# Altium PCB PCB.PcbDoc
Units mil, origin at the board's own origin, x right, y up, seen from the top; angles counter-clockwise.
Board outline 2695 x 1945 mil, 2 copper layers (Top Layer, Bottom Layer); 42 components, 30 nets, 152 pads, 23 vias.
Unrouted connection lines stored in the file: 4.
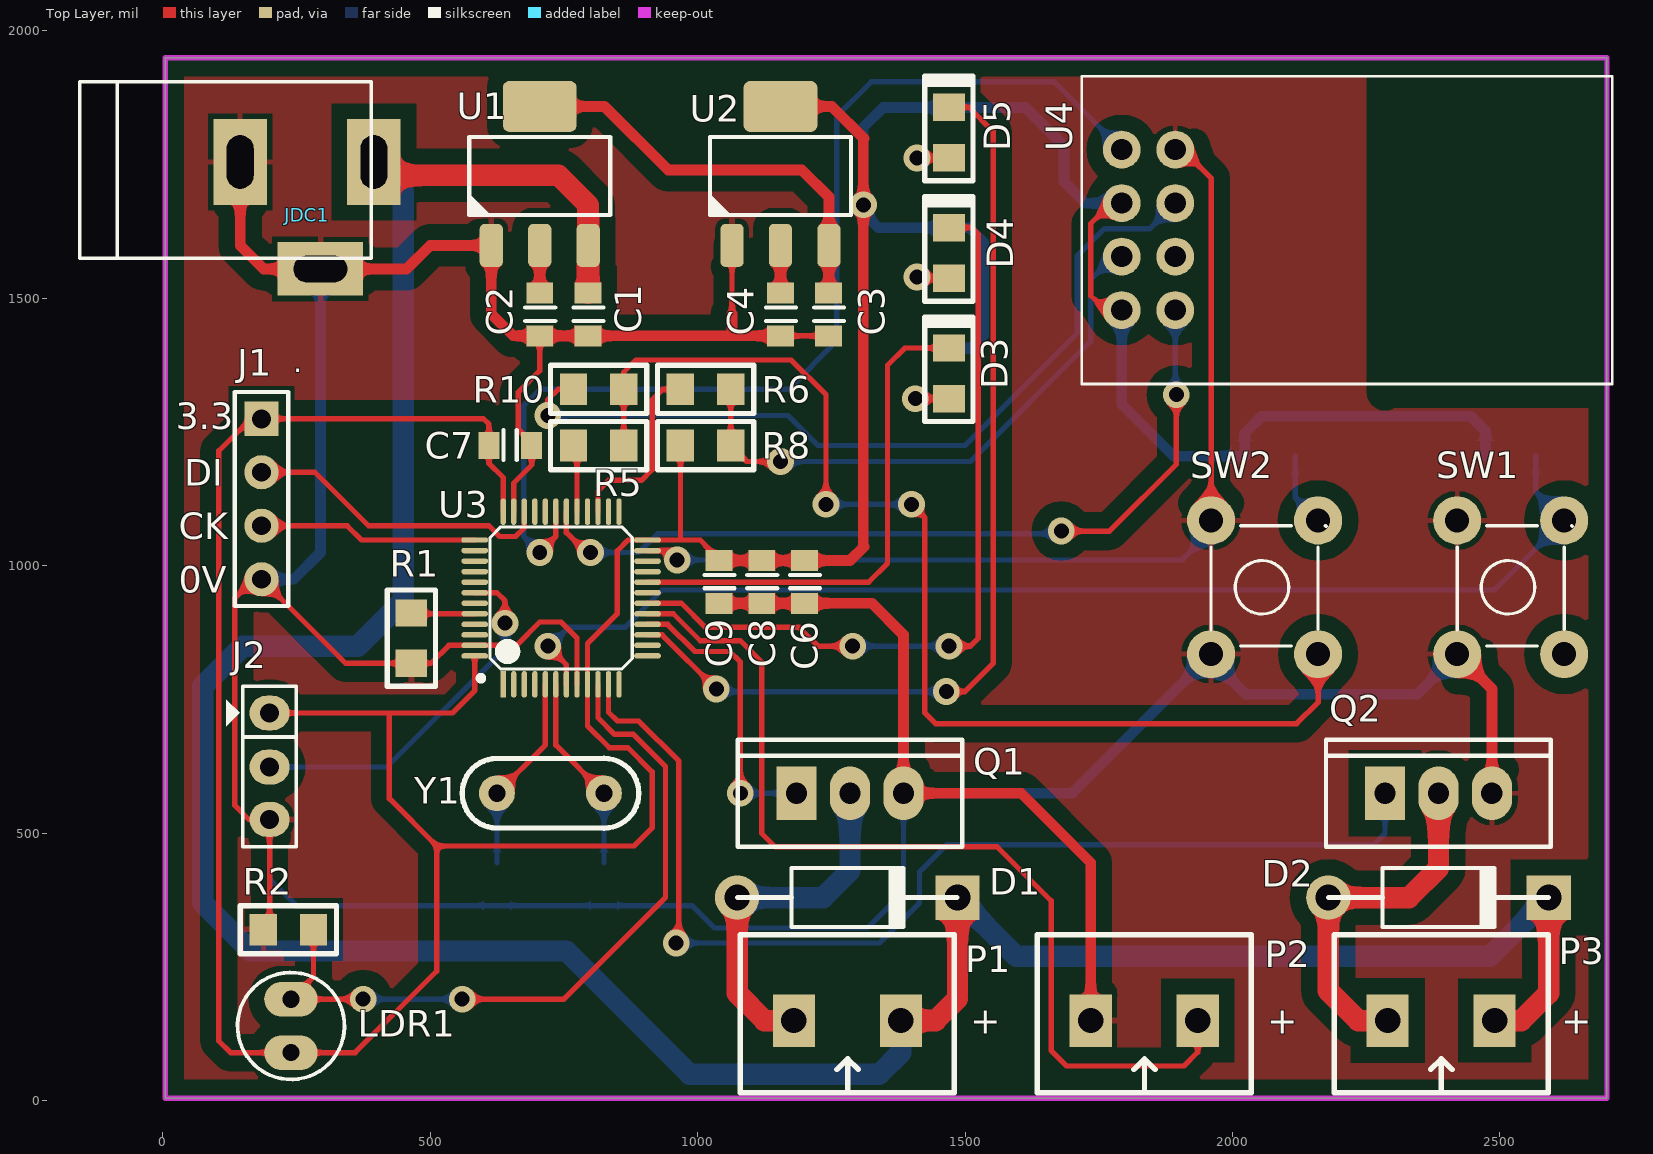
[diagram p0: Top Layer view]
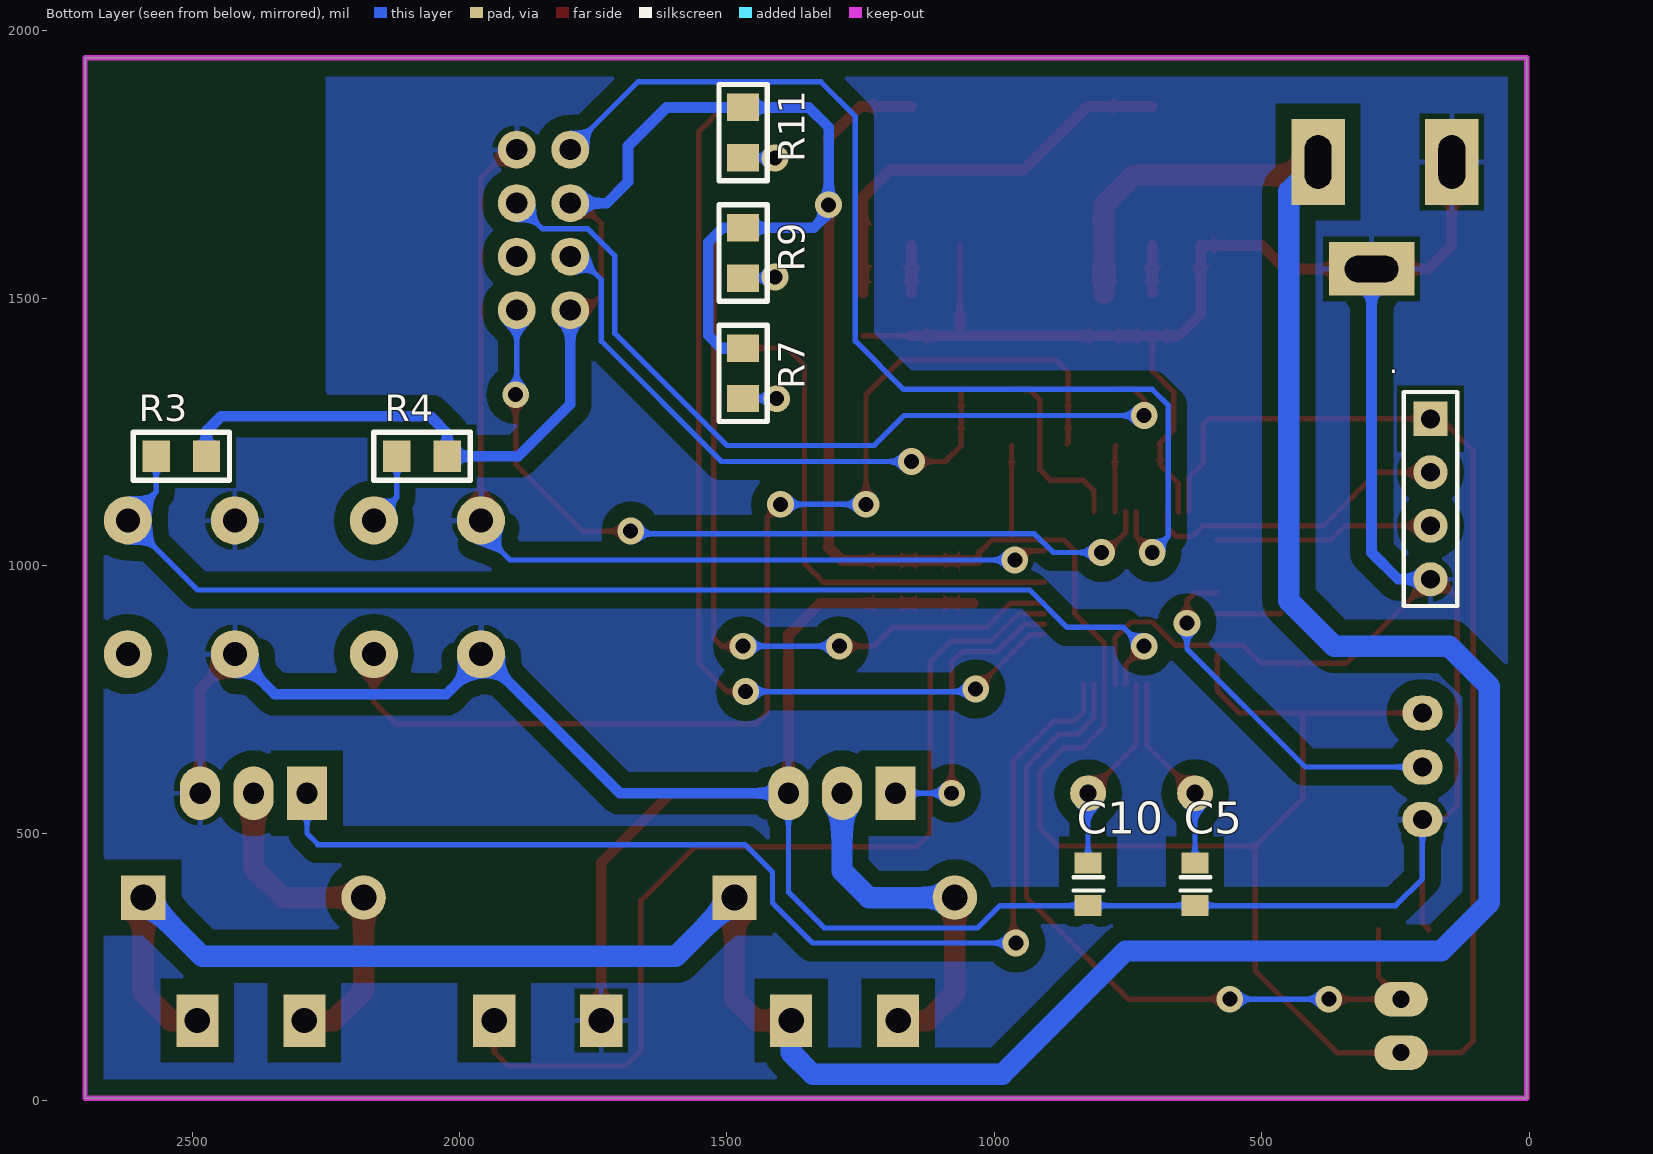
[diagram p1: Bottom Layer view, seen from below]
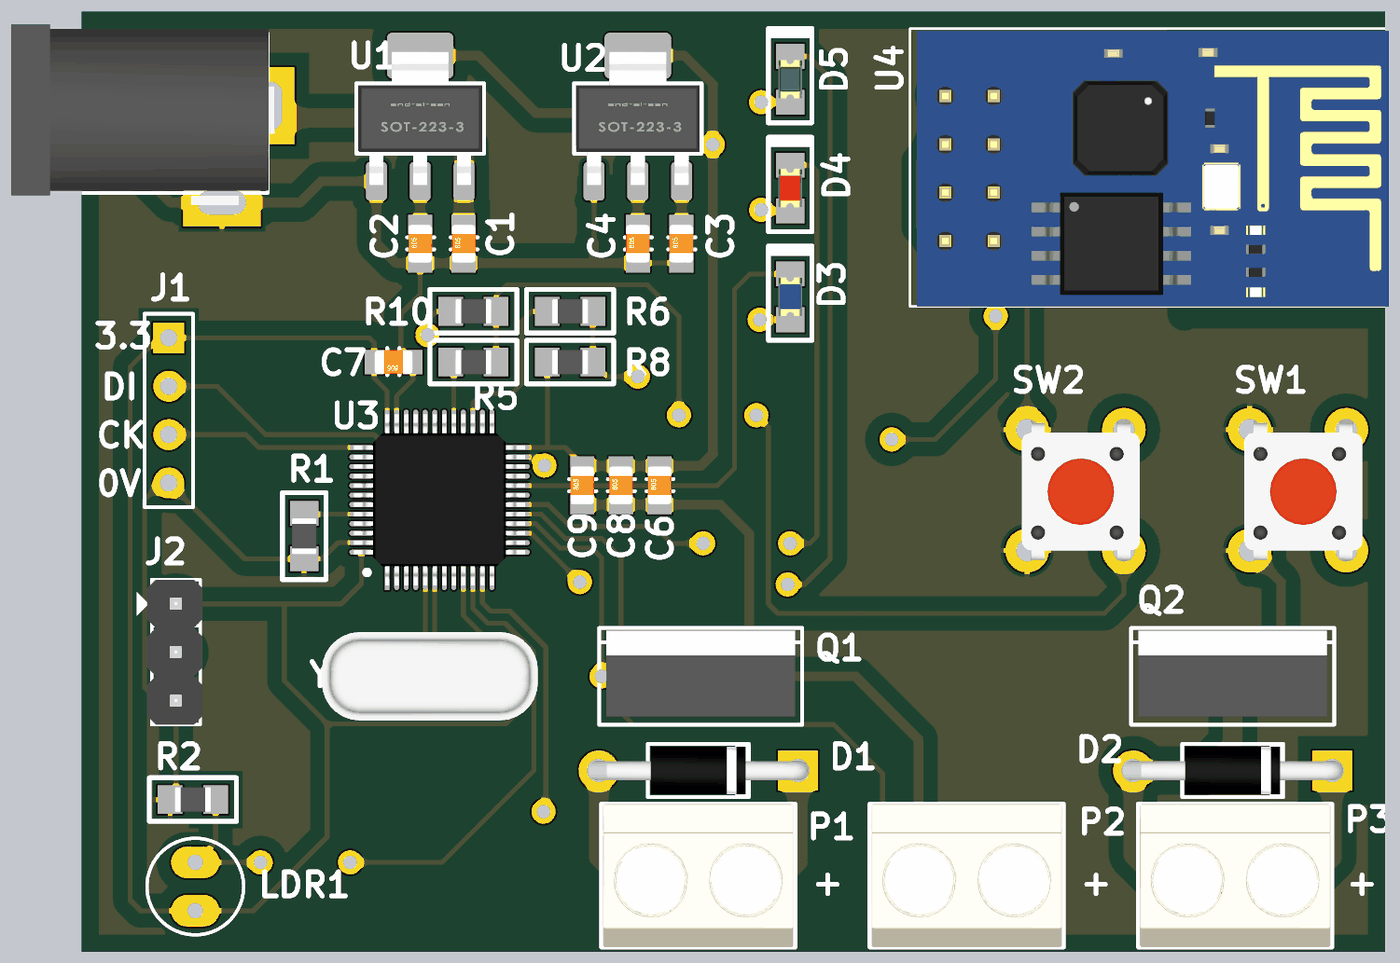
[diagram p2: 3D render of the assembled board from above, using the file's embedded part models]
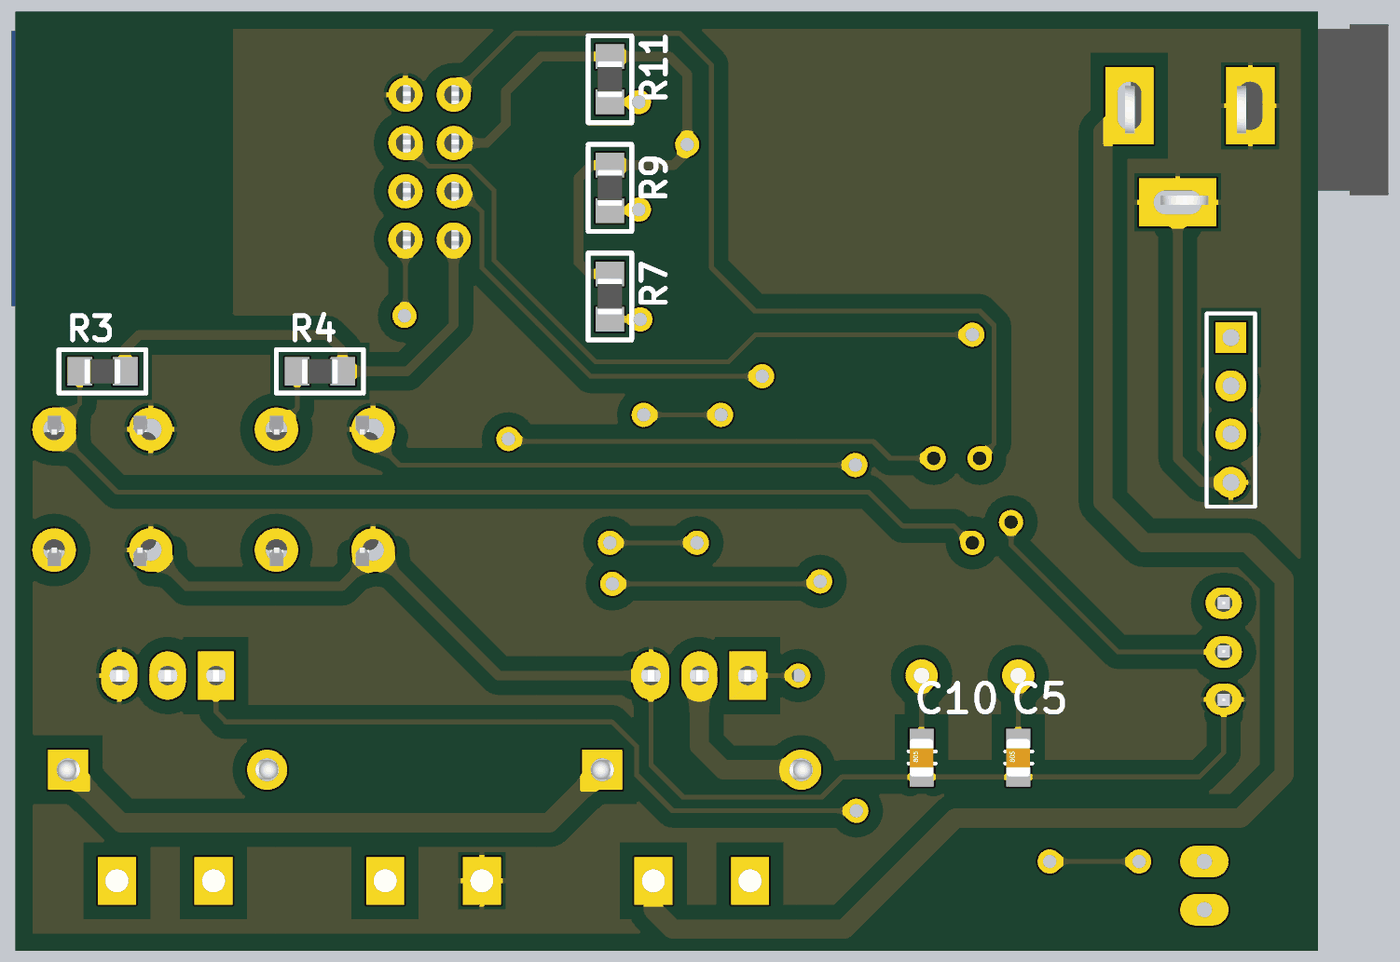
[diagram p3: 3D render of the assembled board from below, using the file's embedded part models]

## Layer stack, top to bottom
Top Solder: solder mask 0.4, Solder Resist, Dk 3.5
Top Layer: signal copper 1.4
Dielectric 1: dielectric 12.6, FR-4, Dk 4.8
Bottom Layer: signal copper 1.4
Bottom Solder: solder mask 0.4, Solder Resist, Dk 3.5

## Board outline
5,5 2700,5 2700,1950 5,1950

## Design rules (kind name [scope] priority, off if disabled: settings)
Clearance [All] p1: gap=5 ignorepadtopadclearanceinfootprint=FALSE
PolygonConnect [All] p1: connectstyle=Relief reliefconductorwidth=10 reliefentries=4 polygonreliefangle="90 Angle" airgapwidth=10
RoutingVias [All] p1: holewidth=28 width=50 viastyle="Through Hole" minholewidth=28 minwidth=50 maxholewidth=28 maxwidth=50
SolderMaskExpansion [All] p1: expansion=4
Width [All] p1: maxlimit=40 minlimit=10 preferedwidth=20
30 further rules are at their usual default settings.

## Components (designator, comment, footprint, x,y, rotation, side; value= is the part's Value field where it differs from the comment)
C1 "Cap Non-pol" CAP_SMD_0805 795,1470 r90 top value=104
C2 "Cap Non-pol" CAP_SMD_0805 705,1470 r90 top value=104
C3 "Cap Non-pol" CAP_SMD_0805 1245,1470 r90 top value=104
C4 "Cap Non-pol" CAP_SMD_0805 1155,1470 r90 top value=104
C5 "Cap Non-pol" CAP_SMD_0805 625,405 r90 bottom value=22p
C6 "Cap Non-pol" CAP_SMD_0805 1200,970 r90 top value=104
C7 "Cap Non-pol" CAP_SMD_0805 650,1225 r180 top value=104
C8 "Cap Non-pol" CAP_SMD_0805 1120,970 r90 top value=104
C9 "Cap Non-pol" CAP_SMD_0805 1040,970 r90 top value=104
C10 "Cap Non-pol" CAP_SMD_0805 825,405 r90 bottom value=22p
D1 "Diode" DO-41 1280,380 r0 top value=FRxxx
D2 "Diode" DO-41 2385,380 r0 top value=FRxxx
D3 "LED" "LED-0805 BLUE" 1470,1360 r90 top
D4 "LED" "LED-0805 RED" 1470,1585 r90 top
D5 "LED" "LED-0805 GREEN" 1470,1810 r90 top
J1 "SW Debug" CON.HDR1X4 185,1275 r270 top
J2 "DHT11" JP3 200,625 r270 top value=J3
JDC1 "Jac DC" DC-IN 270,1655 r0 top
LDR1 "LDR" CDS 240,190 r270 top
P1 "Fan" "Medium - Header 2" 1280,150 r180 top
P2 "Phun suong" "Medium - Header 2" 1835,150 r180 top
P3 "Motor" "Medium - Header 2" 2390,150 r180 top
Q1 "IRF540" TO-220-3 1185,575 r0 top
Q2 "IRF540" TO-220-3 2285,575 r0 top
R1 "RESISTOR" RES_SMD_0805 465,865 r270 top value=10K
R2 "RESISTOR" RES_SMD_0805 235,320 r180 top value=15K
R3 "RESISTOR" RES_SMD_0805 2520,1205 r180 bottom value=10K
R4 "RESISTOR" RES_SMD_0805 2070,1205 r180 bottom value=10K
R5 "RESISTOR" RES_SMD_0805 815,1225 r180 top value=0R
R6 "RESISTOR" RES_SMD_0805 1015,1330 r0 top value=0R
R7 "RESISTOR" RES_SMD_0805 1470,1360 r90 bottom value=1K
R8 "RESISTOR" RES_SMD_0805 1015,1225 r0 top value=10K
R9 "RESISTOR" RES_SMD_0805 1470,1585 r90 bottom value=1K
R10 "RESISTOR" RES_SMD_0805 815,1330 r180 top value=0R
R11 "RESISTOR" RES_SMD_0805 1470,1810 r90 bottom value=1K
SW1 "SW" SW4 2420,835 r90 top value="Button chip 4 pin"
SW2 "SW" SW4 1960,835 r90 top value="Button chip 4 pin"
U1 "AMS1117" SOT223 705,1730 r0 top
U2 "AMS1117" SOT223 1155,1730 r0 top
U3 "STM32F103C8T6-LQFP48" TQFP48L 745,940 r90 top
U4 "ESP-01" ESP8266 2240,1595 r90 top
Y1 "8MHz" XTAL 725,575 r270 top

## Footprints (in the part's own frame and the unit in brackets; to place one, negate y for a bottom-side part, rotate by r counter-clockwise, add the part's x,y. Pads: shape width x height; smd on the part's side, far side on the other; paste and mask are expansions set on the pad)
CAP_SMD_0805 [mil] "Chip Resistor; Body 2.0 x 1.3 mm (LxW typ)"
  rect 39.37x50 smd: 1(-40,0) 2(40,0)
  silkscreen extent -12,-29 13,27, body extent -39,-25 39,25, height 31
CDS [mil] "QUANG TRO"
  oval 65x100 hole 32: 1(0,0) 2(100,0)
  silkscreen extent -50,-100 150,100
CON.HDR1X4 [mil]
  rect 64x64 hole 35.43: 1(0,0)
  round 64 hole 35.43: 2(100,0) 3(200,0) 4(300,0)
  silkscreen extent -50,-50 350,50, body extent -50,-50 350,50, height 350
DC-IN [mil] "Jac DC input"
  rect 100x160 hole 50 slot 100 at 90 deg: 1(125,100) 2(-125,100)
  rect 160x100 hole 50 slot 100 at 0 deg: 3(25,-100)
  silkscreen extent -425,-80 120,250, body extent -410,-105 134,269, height 434
DO-41 [mil] "Diode, Axial; Body 5.2 x 2.7 mm (LxDia. max), Lead Dia. 0.86 mm (max); Solder Pad 35mil"
  round 83 hole 48: 1(-205.91,0)
  rect 83x83 hole 48: 2(205.91,0)
  silkscreen extent -205,-55 205,55, body extent -228,-49 228,49, height 104
ESP8266 [mm]
  round 1.8 hole 1: 1(4.648,11.354) 2(2.108,11.354) 3(-0.432,11.354) 4(-2.972,11.354) 5(-2.972,8.814) 6(-0.432,8.814) 7(2.108,8.814) 8(4.648,8.814)
  silkscreen extent -6.48,-11.94 8.13,13.26, body extent -6.48,-11.89 8.02,12.91, height 14.38
JP3 [mil] "Jumper 3"
  oval 65x75 hole 36: 1(-100,0) 2(1,0) 3(99,0)
  silkscreen extent -150,-81 150,50, body extent -150,-60 150,55, height 355
"LED-0805 BLUE" [mm] "Chip LED; BLUE; Body 2.0 x 1.3 mm (LxW typ) [2012]"
  rect 1.3x1.5 smd: 1(-1.204,0) 2(1.204,0)
  silkscreen extent -2.29,-1.14 2.67,1.14, body extent -1.01,-0.63 1.01,0.62, height 1.1
"LED-0805 GREEN" [mm] "Chip LED; GREEN; Body 2.0 x 1.3 mm (LxW typ) [2012]"
  rect 1.3x1.5 smd: 1(-1.204,0) 2(1.204,0)
  silkscreen extent -2.29,-1.14 2.67,1.14, body extent -1.01,-0.63 1.01,0.62, height 1.1
"LED-0805 RED" [mm] "Chip LED; RED; Body 2.0 x 1.3 mm (LxW typ) [2012]"
  rect 1.3x1.5 smd: 1(-1.204,0) 2(1.204,0)
  silkscreen extent -2.29,-1.14 2.67,1.14, body extent -1.01,-0.63 1.01,0.62, height 1.1
"Medium - Header 2" [mm]
  rect 2x2.5 hole 1.2: 1(-2.54,0) 2(2.54,0)
  silkscreen extent -5.08,-4.08 5.08,3.43, body extent -5,-4.07 5,3.43, height 10
RES_SMD_0805 [mm] "Chip Resistor; Body 2.0 x 1.3 mm (LxW typ) [2012]"
  rect 1.3x1.5 smd: 1(-1.194,0) 2(1.194,0)
  silkscreen extent -2.29,-1.14 2.29,1.14, body extent -0.95,-0.65 0.95,0.65, height 0.63
SOT223 [mm]
  round 1 on Mech15: 0(0,-0.025)
  rrect40% 1.1x2.032 smd: 1(-2.3,-3.325) 2(0,-3.325) 3(2.3,-3.325)
  rrect25% 3.5x2.413 smd: 2(0,3.275)
  silkscreen extent -3.35,-1.88 3.35,1.82, body extent -3.25,-3.53 3.25,3.47, height 1.7
SW4 [mil] "SW button 4pin, 250 x250 mil"
  round 90 hole 45: 1(0,0) 2(250,-200) 3(250,0) 4(0,-200)
  silkscreen extent 15,-215 240,0, body extent -34,-233 278,11, height 276
TO-220-3 [mil] "TO-220; 3 Leads; Solder Pad 35mil"
  rect 75x100 hole 40: 1(0,0)
  oval 75x100 hole 40: 2(100,0) 3(200,0)
  silkscreen extent -110,-100 310,100, body extent -95,-83 295,94, height 760
TQFP48L [mm] "TQFP, 48-Leads, Body 7.00x7.00mm, Pitch 0.50mm, IPC High Density"
  rect 1.27x0.254 smd: 1(-4.1,2.75)
  oval 1.27x0.254 smd: 2(-4.1,2.25) 3(-4.1,1.75) 4(-4.1,1.25) 5(-4.1,0.75) 6(-4.1,0.25) 7(-4.1,-0.25) 8(-4.1,-0.75) 9(-4.1,-1.25) 10(-4.1,-1.75) 11(-4.1,-2.25) 12(-4.1,-2.75) 25(4.1,-2.75) 26(4.1,-2.25) 27(4.1,-1.75) 28(4.1,-1.25) 29(4.1,-0.75) 30(4.1,-0.25) 31(4.1,0.25) 32(4.1,0.75) 33(4.1,1.25) 34(4.1,1.75) 35(4.1,2.25) 36(4.1,2.75)
  oval 0.254x1.27 smd: 13(-2.75,-4.1) 14(-2.25,-4.1) 15(-1.75,-4.1) 16(-1.25,-4.1) 17(-0.75,-4.1) 18(-0.25,-4.1) 19(0.25,-4.1) 20(0.75,-4.1) 21(1.25,-4.1) 22(1.75,-4.1) 23(2.25,-4.1) 24(2.75,-4.1) 37(2.75,4.1) 38(2.25,4.1) 39(1.75,4.1) 40(1.25,4.1) 41(0.75,4.1) 42(0.25,4.1) 43(-0.25,4.1) 44(-0.75,4.1) 45(-1.25,4.1) 46(-1.75,4.1) 47(-2.25,4.1) 48(-2.75,4.1)
  silkscreen extent -3.93,-3.37 3.37,3.93, body extent -4.5,-4.5 4.5,4.5, height 1.45
XTAL [mil] "Crystal, Thru-Hole; 2 Leads; Body 3.1 x 8.2 mm (Dia.xH); Solder pad 35mil"
  round 67 hole 32: 1(0,100) 2(0,-100)
  silkscreen extent -65,-165 65,165, body extent -92,-223 92,223, height 139

## Part data
C1 C2 C3 C4 C5 C6 C7 C8 C9 C10: "Non-polarized Capacitor", LatestRevisionNote="Re-released for DXP Platform.", PackageReference=RAD-0.3, Publisher="Altium Limited"
D3 D4 D5: "Typical LED", LatestRevisionDate=08-Jul-2005, LatestRevisionNote="Mech Layer 1 removed.", PackageReference=LED-1, Published=8-Jun-2000, Publisher="Altium Limited"
J1: library part JP4
J2: library part JP3, "Jumper 3"
JDC1: library part DCIN, "Jac DC input"
LDR1: "Quang Tro"
P1 P2 P3: library part "Header 2 - M", "Header, 2-Pin, Medium", LatestRevisionDate=17-Jul-2002, LatestRevisionNote="Re-released for DXP Platform.", Publisher="Altium Limited"
Q1 Q2: "HEXFET N-Channel Power MOSFET", ComponentLink1Description="Manufacturer Link", ComponentLink1URL=http://www.irf.com/, DatasheetVersion=PD-9.373H, LatestRevisionDate=17-Jul-2002, LatestRevisionNote="Re-released for DXP Platform.", Note="Pin 2 is electrically connected to pin 4.", PackageDescription="TO, Thru-Hole, Vertical, Heatsink Mounted; 3 In-Line Leads; Pitch 2.54 mm", PackageReference=TO-220AB, PackageVersion=Feb-1997, Published=8-Jun-2000, Publisher="Altium Limited"
R1 R2 R3 R4 R5 R6 R7 R8 R9 R10 R11: "Resistor", LatestRevisionDate=17-Jul-2002, LatestRevisionNote="Re-released for DXP Platform.", PackageReference=AXIAL-0.3, Published=8-Jun-2000, Publisher="Altium Limited"
SW1 SW2: library part SW4, "Switch button 4 pin"
U1 U2: "Regulator SMD Chip", ComponentLink1Description="Digikey Part Link", ComponentLink2Description="Open Datasheet", ComponentLink2URL=H:\LIBRARY\LIBRARY.Datasheet\, Designed By="John MacTavish", Vendor=Digikey
U4: library part ESP8266-01, "ESP-12 Wi-Fi Module"
Y1: library part XTAL, "Crystal Oscillator", LatestRevisionDate=17-Jul-2002, LatestRevisionNote="Re-released for DXP Platform.", PackageReference=R38, Published=8-Jun-2000, Publisher="Altium Limited"
D1 D2: Code_JEDEC=DO-204-AH, ComponentLink1Description="Digikey Part Link", ComponentLink1URL=http://www.fairchildsemi.com/, ComponentLink2Description="Open Datasheet", ComponentLink2URL=H:\LIBRARY\LIBRARY.Datasheet\ds26003.pdf, DatasheetDocument=1997, LatestRevisionDate=17-Jul-2002, LatestRevisionNote="Re-released for DXP Platform.", PackageReference=DO-35, Published=8-Jun-2000, Publisher="Altium Limited", Vendor=Digikey
U3: ComponentLink1Description="Manufacturer Link", ComponentLink1URL=www.st.com/stm32, ComponentLink2Description=Datasheet, ComponentLink2URL=http://www.st.com/stonline/products/literature/ds/13586.pdf, DatasheetVersion="rev6, Mar-2008", PackageDescription="48-Pin Low-Profile Quad Flat Pack, 7 x 7 mm Body, 0.5 mm Pitch (LQFP48)", PackageReference=LQFP48, PackageVersion=Mar-2008, Published=30-May-2008, Publisher="Altium Limited"

## Via types
v1: diameter 50, hole 28, Top Layer to Bottom Layer, 23 vias

## Nets (pads, with @x,y where several pads share a name; then routed paths per layer and width w, separated by ;. In a path a pad name is that pad's centre, name@x,y a point inside that pad or via, vN(x,y) a via of type N, cw(c..) or ccw(c..) an arc to the next point about the centre after c; other vN are vias at no path point)
BOOT0: R1.1 U3.44 | length 119.2
  Top Layer w10: R1.1 466.53,910.47 U3.44
CONFIG: R4.1 R5.1 R10.1 SW2.2 SW2.4 | length 2303
  Top Layer w10: R5.1@864.5,1227.5 862,1230 R10.1 862,1362 885,1385 1175,1385 1240,1320 v1(1240,1115) ; v1(1400,1115) 1425,1090 1425,725 1445,705 2120,705 2160,745 SW2.4
  Bottom Layer w10: v1(1240,1115) v1(1400,1115) ; R4.1 2117,1128 SW2.2
DHT11: J2.2 U3.42 | length 684.1
  Top Layer w10: U3.42 625.16,949.84 640,935 v1(640,893)
  Bottom Layer w10: J2.2 419,624 640,845 v1(640,893)
E_RST: R6.1 U3.27 | length 347.5
  Top Layer w10: U3.27 813.9,1140 833.9,1160 895,1160 915,1180 915,1310 935,1330 R6.1
E_RX: U3.30 U4.5 | length 1552
  Top Layer w10: U3.30 754.84,1062.16 792,1025 v1(800,1025) ; v1(1680,1065) 1770,1065 1895,1190 v1(1895,1320)
  Bottom Layer w10: v1(800,1025) 890,1025 925,1060 1675,1060 v1(1680,1065) ; U4.5 1893,1322 v1(1895,1320)
E_TX: U3.31 U4.1 | length 2043.6
  Top Layer w10: v1(705,1025) 735.16,1055.16 U3.31
  Bottom Layer w10: v1(705,1025) 675,1055 675,1300 705,1330 1170,1330 1260,1420 1260,1840 1325,1905 1666,1905 U4.1
FAN: Q1.1 U3.16 | length 565.3
  Top Layer w10: U3.16 944.21,890.79 995,840 1060,840 1080,820 v1(1080,575)
  Bottom Layer w10: v1(1080,575) 1155,575 1170,590 Q1.1
GND: C1.1 C2.1 C3.1 C4.1 C5.1 C6.1 C7.1 C8.1 C9.1 C10.1 J1.4 J2.3 JDC1.2 JDC1.3 P2.2 Q1.3 Q2.3 R1.2 R2.2 SW1.1 SW1.3 SW2.1 SW2.3 U1.1 U2.1 U3.8 U3.23 U3.35 U3.47 U4.8 | length 10402.9
  Top Layer w10: R2.2 200,332 J2.3 161,526 135,552 135,940 170,975 J1.4 342,818 R1.2 501.58,818 535,851.42 U3.47 661.42,851.42 705,895 745,895 774.53,865.47 U3.8 ; U3.35 656.42,1155 690,1188.58 C7.1 ; C7.1@692.5,1227.5 665,1255 665,1325 705,1365 C2.1 ; U3.23 944.42,1028.58 v1(962,1011) ; 1064.45,1471 U2.1 ; C4.1 C3.1 ; U4.8 1907,1778 1960,1725 SW2.3
  Top Layer w20: JDC1.2 145,1599 189,1555 JDC1.3 456,1555 500.08,1599.08 U1.1 614.45,1471 655.45,1430 C2.1 C1.1 1060,1430 ; C9.1 C8.1 C6.1 1326,930 1385,871 Q1.3 1605,575 1735,445 P2.2 ; 1064.45,1471 1064.45,1434.45 1060,1430 ; C4.1 1060,1430 ; SW1.1 2485,770 Q2.3
  Bottom Layer w10: J2.3 200,415 250,365 C5.1 C10.1 990,365 1032,323 1318,323 1385,390 Q1.3 ; v1(962,1011) 1906,1011 1960,1065 SW2.3
  Bottom Layer w20: J1.4 245,975 295,1025 JDC1.3 ; Q1.3 1700,575 SW2.1 1960,825 2025,760 2345,760 SW1.1
LED_CONFIG: D3.2 U3.20 | length 962
  Top Layer w10: U3.20 1320,969.53 1355,1004.53 1355,1375 1387.4,1407.4 D3.2
LED_ERROR: D4.2 U3.18 | length 1473.1
  Top Layer w10: U3.18 969.84,930.16 1015,885 1190,885 1225,850 v1(1290,850) ; v1(1470,850) 1510,850 1525,865 1525,1620 1512.6,1632.4 D4.2
  Bottom Layer w10: v1(1290,850) v1(1470,850)
LED_OK: D5.2 U3.15 | length 1812.1
  Top Layer w10: U3.15 933.9,871.1 v1(1035,770) ; v1(1465,765) 1500,765 1552.6,817.6 1552.6,1812.4 1507.6,1857.4 D5.2
  Bottom Layer w10: v1(1035,770) 1045,760 1050,765 v1(1465,765)
LIGHT: LDR1.1 R2.1 U3.10 | length 1397.4
  Top Layer w10: R2.1 282,232 LDR1.1 v1(375,190) ; v1(560,190) 750,190 940,380 940,625 880,685 845,685 813.9,716.1 U3.10
  Bottom Layer w10: v1(375,190) v1(560,190)
MIST: P2.1 U3.17 | length 1800
  Top Layer w10: U3.17 954.53,910.47 1005,860 1080,860 1120,820 1120,500 1145,475 1560,475 1661,374 1661,94 1690,65 1909,65 1935,91 P2.1
MOTOR: Q2.1 U3.11 | length 2083
  Top Layer w10: U3.11 833.58,726.42 850,710 890,710 965,635 965,300 v1(960,295)
  Bottom Layer w10: v1(960,295) 1340,295 1415,370 1415,428 1466,479 2265,479 2265,480 2285,500 Q2.1
NetD1_1: D1.1 P1.2 Q1.2 | length 682.7
  Top Layer w40: D1.1 1074.09,200.91 1125,150 P1.2
  Bottom Layer w40: D1.1 1235,380 1285,430 Q1.2
NetD2_1: D2.1 P3.2 Q2.2 | length 676.8
  Top Layer w40: P3.2 2235,150 2179.09,205.91 D2.1 2330,380 2385,435 Q2.2
NetD3_1: D3.1 R7.1 | length 126.2
  Top Layer w10: v1(1407,1312.6) D3.1
  Bottom Layer w10: v1(1407,1312.6) 1407.4,1313 R7.1
NetD4_1: D4.1 R9.1 | length 121.8
  Top Layer w10: v1(1410,1540) 1412.4,1537.6 D4.1
  Bottom Layer w10: v1(1410,1540) 1412,1538 R9.1
NetD5_1: D5.1 R11.1 | length 120.2
  Top Layer w10: v1(1410,1762.6) D5.1
  Bottom Layer w10: v1(1410,1762.6) 1410.4,1763 R11.1
NetR5_2: R5.2 U3.29 | length 124.2
  Top Layer w10: R5.2@773,1225 774.53,1223.47 U3.29
NetR6_2: R6.2 R8.2 U4.3 | length 1074.4
  Top Layer w10: R6.2 R8.2 1092,1195 v1(1155,1195)
  Bottom Layer w10: v1(1155,1195) 1510,1195 1735,1420 1735,1535 1778,1578 U4.3
NetR10_2: R10.2 U4.7 | length 1559.6
  Top Layer w10: v1(720,1281) 720,1311 739,1330 R10.2 R10.2@773,1330
  Bottom Layer w10: v1(720,1281) 1169,1281 1225,1225 1500,1225 1710,1435 1710,1580 1760,1630 1845,1630 U4.7
NRST: R3.1 SW1.2 SW1.4 U3.7 | length 2225.1
  Top Layer w10: v1(720,850) 754.84,815.16 U3.7
  Bottom Layer w10: v1(720,850) 724,850 759,885 864,885 934,955 2490,955 SW1.2 2567,1138 R3.1
P3.3: C4.2 C6.2 C7.2 C8.2 C9.2 J1.1 J2.1 LDR1.2 R3.2 R4.2 R7.2 R8.1 R9.2 R11.2 U2.2 U3.9 U3.24 U3.36 U3.48 U4.2 U4.4 | length 8576.8
  Top Layer w10: J2.1 423,725 424,724 ; U3.48 583.58,767 541.58,725 425,725 424,724 ; U3.36 636.73,1165 610,1191.73 C7.2 610,1265 600,1275 J1.1 165,1275 105,1215 105,112 127,90 LDR1.2 360,90 512.5,242.5 512.5,476.5 ; R8.1 968,1050.27 970,1048.27 ; C9.2@1030,1010 1030,1023.27 1005,1048.27 970,1048.27 ; U4.4 1762,1478 1735,1505 1735,1640 1773,1678 U4.2 ; 424,724 424,565 512.5,476.5 ; 512.5,476.5 881.5,476.5 915,510 915,615 870,660 835,660 794.21,700.79 U3.9 794.21,855 850,910.79 850,1028.27 870,1048.27 U3.24 970,1048.27
  Top Layer w20: C9.2@1030,1010 C9.2 C8.2 C6.2 1285,1010 1311,1036 1310,1037 v1(1310,1675) 1310,1798 1311,1799 1251.08,1858.92 U2.2@1155,1858.92 ; C4.2 U2.2@1155,1599.08
  Bottom Layer w10: R11.2 1501,1857
  Bottom Layer w20: R7.2 1511,1407 1535,1431 1535,1605 1508,1632 R9.2 1338,1632 1310,1660 v1(1310,1675) 1310,1820 1347,1857 R11.2 ; 1501,1857 1613,1857 1685,1785 1685,1718 1725,1678 U4.2 ; U4.4 1793,1302 1890,1205 R4.2 2023,1248 2055,1280 2445,1280 2473,1252 R3.2
P5.0: C2.2 C3.2 U1.2 U2.3 | length 879.5
  Top Layer w20: C2.2 U1.2@705,1599.08 ; U1.2@705,1858.92 826.08,1858.92 945,1740 1195,1740 1245.55,1689.45 U2.3 1245.55,1510.55 C3.2
P12.0: C1.2 D1.2 D2.2 JDC1.1 P1.1 P3.1 U1.3 | length 5610.9
  Top Layer w10: 1485.91,191 1485.91,200
  Top Layer w40: JDC1.1 420,1730 740,1730 795.55,1674.45 U1.3 795,1598.53 C1.2 ; P1.1 1444.91,150 1485.91,191 ; 1485.91,200 D1.2 ; P3.1 2540,150 2590.91,200.91 D2.2
  Bottom Layer w40: JDC1.1 450,1700 450,935 365,850 150,850 75,775 75,370 165,280 755,280 985,50 1340,50 1380,90 P1.1 ; D1.2 1595.91,270 2480.91,270 D2.2
SWCLK: J1.3 U3.37 | length 409.7
  Top Layer w10: J1.3 345,1075 371.73,1048.27 U3.37
SWDIO: J1.2 U3.34 | length 577.8
  Top Layer w10: J1.2 285,1175 385,1075 610,1075 630,1055 660,1055 676.1,1071.1 U3.34
XTAL1: C5.2 U3.5 Y1.2 | length 371.1
  Top Layer w10: Y1.2 715.47,665.47 U3.5
  Bottom Layer w10: C5.2 Y1.2
XTAL2: C10.2 U3.6 Y1.1 | length 370.8
  Top Layer w10: U3.6 735.16,664.84 Y1.1
  Bottom Layer w10: C10.2 Y1.1
pads on no net: U1.0 U2.0 U3.1 U3.2 U3.3 U3.4 U3.12 U3.13 U3.14 U3.19 U3.21 U3.22 U3.25 U3.26 U3.28 U3.32 U3.33 U3.38 U3.39 U3.40 U3.41 U3.43 U3.45 U3.46 U4.6

## Polygon pours and split planes (outlines as drawn)
GND on Bottom Layer "Bottom Layer-No Net" (solid, remove dead copper, pour order 8): 5,1950 2700,1950 2700,5 5,5
GND on Top Layer "Bottom Layer-No Net" (solid, remove dead copper, pour order 10): 5,1950 2700,1950 2700,5 5,5

## Keep-outs
Keep-Out Layer:
  the board outline again, w10

## Silkscreen, mask and mechanical layers (free items; w line width, h text height)
Top Overlay:
  text "3.3" at 25,1255 h50
  text "DI" at 40,1150 h50
  text "CK" at 30,1050 h50
  text "0V" at 30,950 h50
  text "+" at 1510,125 h50
  text "+" at 2065,125 h50
  text "+" at 2615,125 h50